# EAGLE board AQ_sensor_GSM (EAGLE 9.6.2)
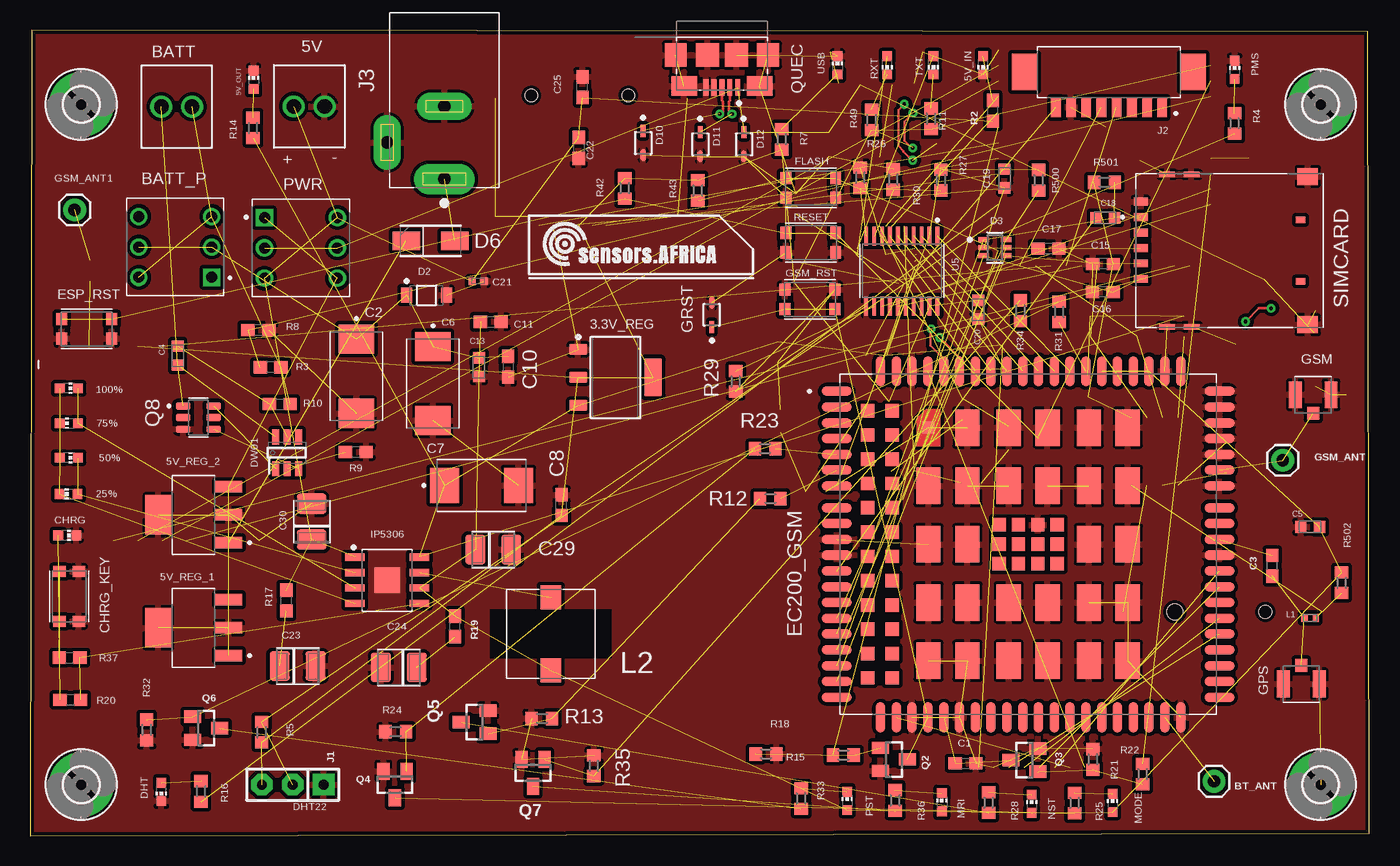
[diagram p0: board, top side]
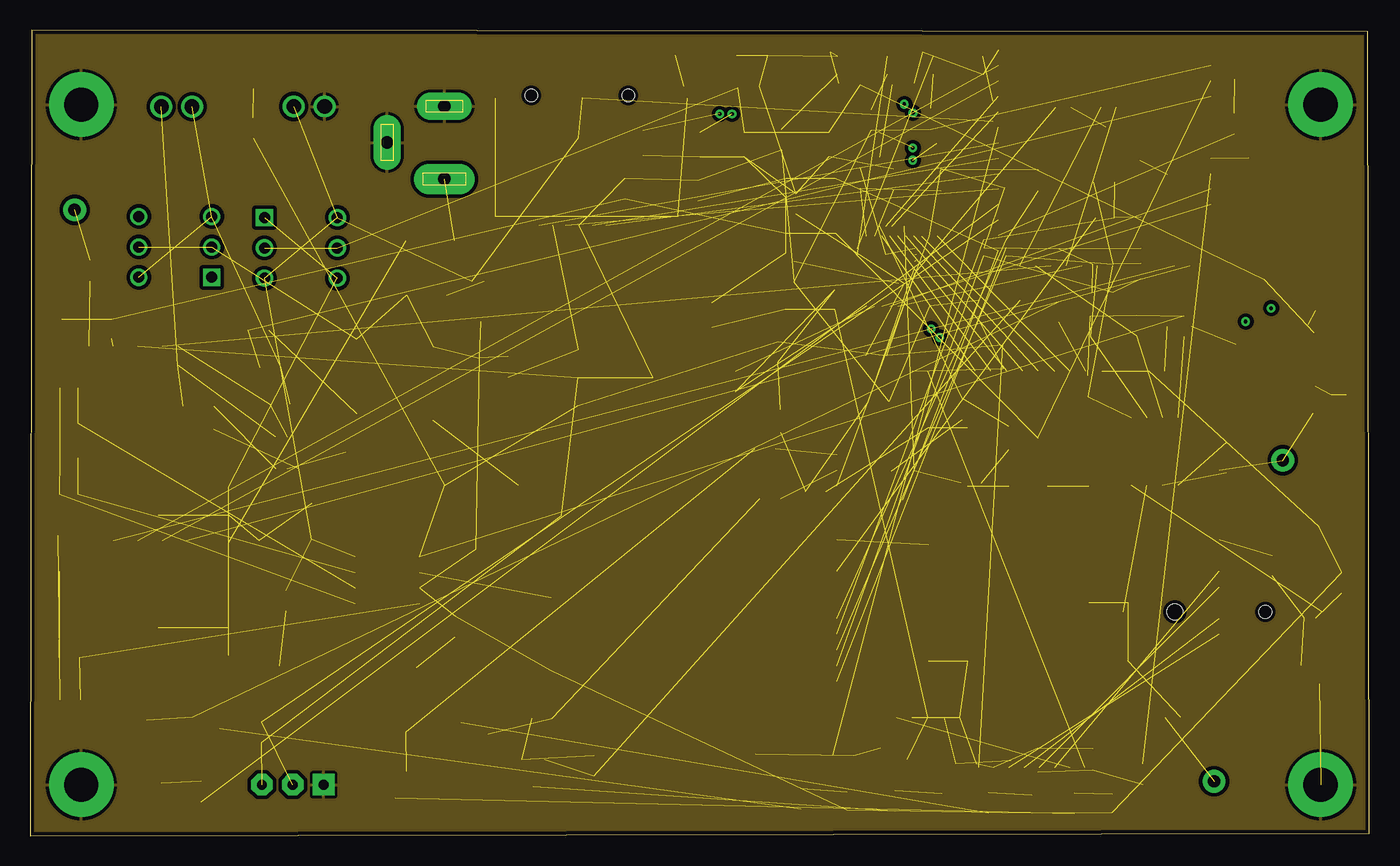
[diagram p1: board, inner layer GND]
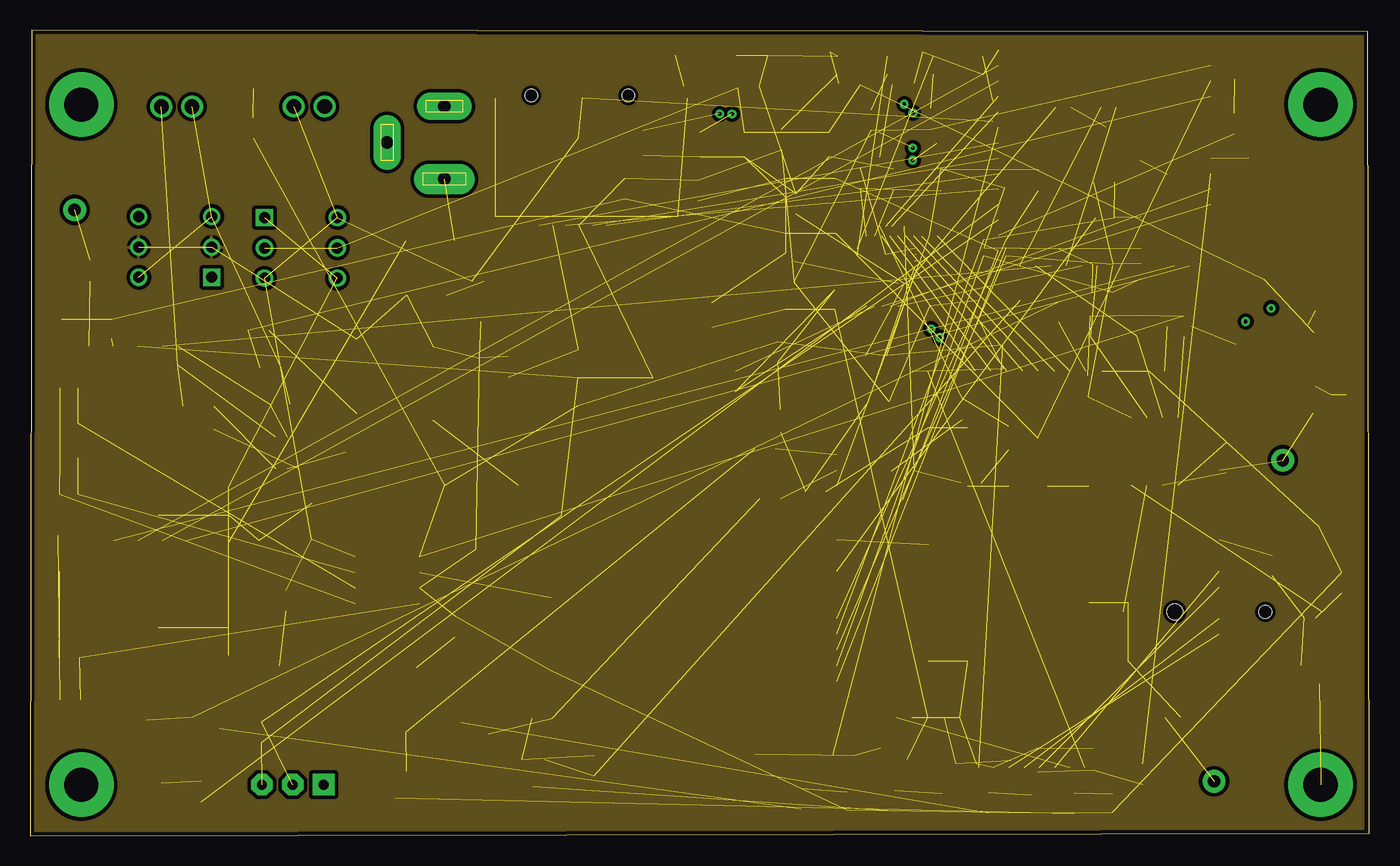
[diagram p2: board, inner layer V_LIPO]
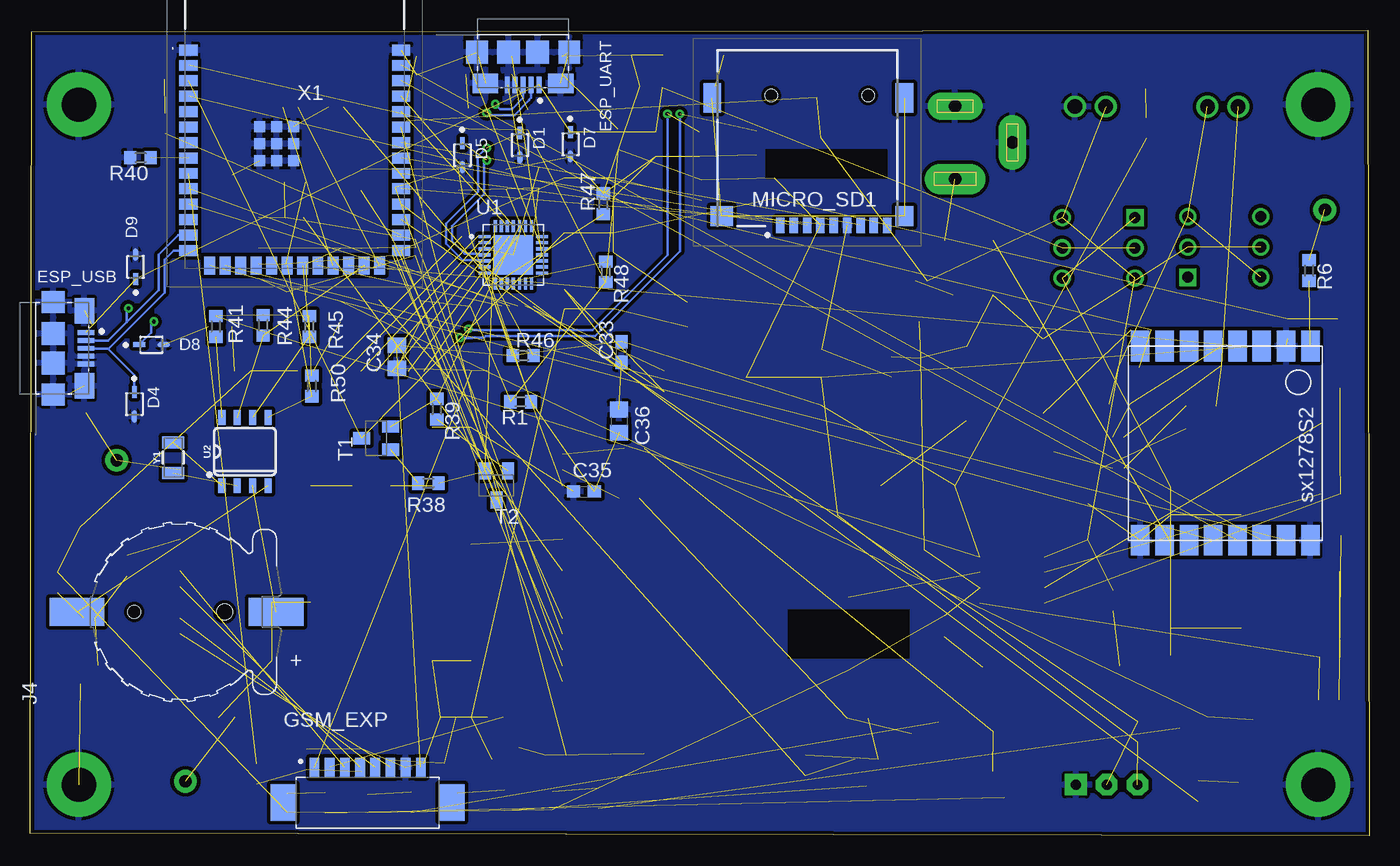
[diagram p3: board, bottom side, seen from below]

Size 110.2 x 66.3 mm. Coordinates in mm from the lower left corner, seen from the top.
Outline: 110.1,66.2 0.1,66.3 0,0 110.2,0.2 110.1,66.2
Copper layers (1+2*15+16): Top 0.035mm / dielectric 1.5mm / GND 0.035mm / dielectric 0.15mm / V_LIPO 0.035mm / dielectric 0.2mm / Bottom 0.035mm
Design rules "default *": minimum track width 0.1mm, minimum drill 0.15mm, track to track 0.3mm, track to pad 0.1mm, pad to pad 0.2mm, via to via 0.3mm, smd to smd 0.3mm, copper to edge 0.3mm, drill to drill 0.3mm, minimum pad ring 10mil, minimum via ring 8mil, stop-mask expansion 4mil, vias tented up to drill 0mil, thermal gap 10mil
Net classes: 0 default: width 0.2 mm, drill 0.2 mm, clearance 0.2 mm; 1 POWER: width 0.3 mm, drill 0.2 mm, clearance 0.2 mm to class 0, clearance 0.2 mm; 2 BGA: width 0.1 mm, drill 0.2 mm; 3 HCurrent: width 0.8 mm, drill 0.4 mm, clearance 0.2 mm to class 0; 4 Antenna: width 0.3 mm, drill 0.2 mm, clearance 0.2 mm to class 0

## Footprints (pad centres in the part's own frame; a part is rotated, then mirrored left to right if it is on the bottom)
TEXAS_INSTRUMENTS_LM1117IMP-3.3-NOPB_0 = smd 1.45 x 0.9: 1 -3.075,2.3; 2 -3.075,0; 3 -3.075,-2.3 | smd 1.45 x 3.15: 4 3.075,0
TERMBLK_254-2N = drill 1.2: 1 0,0; 2 2.54,0
CHIP-LED0603 = smd 0.8 x 0.8: A 0,-0.75; C 0,0.75
VREG_LM7805MPX/NOPB = smd 2.15 x 0.95: 1 -2.9,2.3; 2 -2.9,0; 3 -2.9,-2.3 | smd 2.15 x 3.25: 4 2.9,0
SW_TL2285EE = drill 0.9 square: 1 -2.5,-3 | drill 0.9: 2 0,-3; 3 2.5,-3; 4 -2.5,3; 5 0,3; 6 2.5,3
1X01 = drill 1.016 pad 1.88: 1 0,0
0603 = smd 1.1 x 1: 1 -0.85,0; 2 0.85,0
CAP_20TQC100MYF = smd 2.4 x 2.9: 1 -3.05,0; 2 3.05,0
CAPC1608X90N = smd 0.92 x 0.98: 1 -0.775,0; 2 0.775,0
C0603 = smd 1.1 x 1: 1 -0.85,0; 2 0.85,0
0402-TIGHT = smd 0.6 x 0.6: 1 -0.5,0; 2 0.5,0
CAP_TANT_B = smd 1.66 x 2.42: 1 -1.475,0; 2 1.475,0
C0805 = smd 1.3 x 1.5: 1 -0.95,0; 2 0.95,0
SW_KMR621NGLFS = smd 0.9 x 1: 1_1 -2.05,0.8; 1_2 2.05,0.8; 2_1 -2.05,-0.8; 2_2 2.05,-0.8
ON_SEMI_1N4148WS_0 = smd 1.006 x 0.392: 1 -1,0; 2 1,0
ON_SEMICONDUCTOR_MMSZ5231BT1G_0 = smd 0.91 x 1.22: 1 -1.635,0; 2 1.635,0
SEMTECH_SMF05C_0 = smd 0.85 x 0.4: 1 -0.925,0.65; 2 -0.925,0; 3 -0.925,-0.65; 4 0.925,-0.65; 5 0.925,0; 6 0.925,0.65
DIOM5025X220N = smd 2.25 x 1.55: 1 -2,0; 2 2,0
SOT23-6L = smd 0.55 x 1.2: 1 -0.95,-1.3; 2 0,-1.3; 3 0.95,-1.3; 4 0.95,1.3; 5 0,1.3; 6 -0.95,1.3
XCVR_EC200UCNAB-N05-SNNSA = smd 2.5 x 0.8: 1 -15.75,12.6; 2 -15.75,11.3; 3 -15.75,10; 4 -15.75,8.7; 5 -15.75,7.4; 6 -15.75,6.1; 7 -15.75,4.8; 8 -15.75,0.4; 9 -15.75,-0.9; 10 -15.75,-2.2; 11 -15.75,-3.5; 12 -15.75,-4.8; 13 -15.75,-6.1; 14 -15.75,-7.4; 15 -15.75,-8.7; 16 -15.75,-10; 17 -15.75,-11.3; 18 -15.75,-12.6; 37 15.75,-12.6; 38 15.75,-11.3; 39 15.75,-10; 40 15.75,-8.7; 41 15.75,-7.4; 42 15.75,-6.1; 43 15.75,-4.8; 44 15.75,-3.5; 45 15.75,-2.2; 46 15.75,-0.9; 47 15.75,0.4; 48 15.75,4.8; 49 15.75,6.1; 50 15.75,7.4; 51 15.75,8.7; 52 15.75,10; 53 15.75,11.3; 54 15.75,12.6; 141 -15.75,3; 142 -15.75,1.7; 143 15.75,1.7; 144 15.75,3 | smd 0.8 x 2.5: 19 -9.55,-14.25; 20 -8.25,-14.25; 21 -6.95,-14.25; 22 -5.65,-14.25; 23 -4.35,-14.25; 24 -3.05,-14.25; 25 -1.75,-14.25; 26 -0.45,-14.25; 27 0.85,-14.25; 28 2.15,-14.25; 29 3.45,-14.25; 30 4.75,-14.25; 31 6.05,-14.25; 32 7.35,-14.25; 33 8.65,-14.25; 34 9.95,-14.25; 35 11.25,-14.25; 36 12.55,-14.25; 55 12.55,14.25; 56 11.25,14.25; 57 9.95,14.25; 58 8.65,14.25; 59 7.35,14.25; 60 6.05,14.25; 61 4.75,14.25; 62 3.45,14.25; 63 2.15,14.25; 64 0.85,14.25; 65 -0.45,14.25; 66 -1.75,14.25; 67 -3.05,14.25; 68 -4.35,14.25; 69 -5.65,14.25; 70 -6.95,14.25; 71 -8.25,14.25; 72 -9.55,14.25; 113 -10.85,14.25; 114 -12.15,14.25; 115 -10.85,-14.25; 116 -12.15,-14.25 | smd 1.1 x 1.1: 73 2.4,1.6; 74 2.4,0; 75 2.4,-1.6; 76 0.8,1.6; 77 0.8,0; 78 0.8,-1.6; 79 -0.8,1.6; 80 -0.8,0; 81 -0.8,-1.6; 82 -2.4,1.6; 83 -2.4,0; 84 -2.4,-1.6; 117 -11.2,11; 118 -11.2,9; 119 -11.2,7; 120 -11.2,5; 121 -11.2,3; 122 -11.2,1; 123 -11.2,-1; 124 -11.2,-3; 125 -11.2,-5; 126 -11.2,-7; 127 -11.2,-9; 128 -11.2,-11; 129 -13.2,11; 130 -13.2,9; 131 -13.2,7; 132 -13.2,5; 133 -13.2,3; 134 -13.2,1; 135 -13.2,-1; 136 -13.2,-3; 137 -13.2,-5; 138 -13.2,-7; 139 -13.2,-9; 140 -13.2,-11 | smd 2 x 3: 85 8.2,9.6; 86 8.2,4.8; 87 8.2,0; 88 8.2,-4.8; 89 8.2,-9.6; 90 5,9.6; 91 5,4.8; 92 5,0; 93 5,-4.8; 94 5,-9.6; 95 1.6,9.6; 96 1.6,4.8; 97 1.6,-4.8; 98 1.6,-9.6; 99 -1.6,9.6; 100 -1.6,4.8; 101 -1.6,-4.8; 102 -1.6,-9.6; 103 -5,9.6; 104 -5,4.8; 105 -5,0; 106 -5,-4.8; 107 -5,-9.6; 109 -8.2,4.8; 110 -8.2,0; 111 -8.2,-4.8; 112 -8.2,-9.6 | smd 1 x 1: 108 -8.2,9.6
AMPHENOL_10118192-0001LF = smd 0.4 x 1.35: 1 -1.3,0; 2 -0.65,0; 3 0,0; 4 0.65,0; 5 1.3,0 | smd 2.1 x 1.6: SH1 -3.1,-0.125; SH2 3.1,-0.125 | smd 1.8 x 1.9: SH3 -3.8,-2.675; SH6 3.8,-2.675 | smd 1.9 x 1.9: SH4 -1.2,-2.675; SH5 1.2,-2.675
TE_1909763-1 = smd 1 x 1.05: 1 0,-1.525 | smd 1.05 x 2.2: 2 -1.475,0; 3 1.475,0
MOLEX_53261-0871 = smd 0.8 x 1.6: 1 -4.375,2.9; 2 -3.125,2.9; 3 -1.875,2.9; 4 -0.625,2.9; 5 0.625,2.9; 6 1.875,2.9; 7 3.125,2.9; 8 4.375,2.9 | smd 2.1 x 3: S1 -6.925,0; S2 6.925,0
2,8-PAD = drill 2.8 pad 5.334: B2,8 0,0
SOIC127P600X165-9T209N = smd 1.609 x 0.594: 1 -2.653,1.905; 2 -2.653,0.635; 3 -2.653,-0.635; 4 -2.653,-1.905; 5 2.653,-1.905; 6 2.653,-0.635; 7 2.653,0.635; 8 2.653,1.905 | smd 2.09 x 2.09: 9 0,0
SIP-100-03-32 = drill 0.813 pad 1.778 square: 1 -2.54,0 | drill 0.813 pad 1.778 octagon: 2 0,0; 3 2.54,0
CUI_PJ-002BH = drill 1 pad 2.5 long: 1 0,0 | drill 1 pad 2.25 long: 2 6,0; 3 3,4.7
HARWIN_S8411-45R = smd 2.3 x 4.5: N 0,8.425; P 0,-7.975 | hole 1.05: 0,3.725 | hole 1.3: 0,-3.725
INDC1005X60N = smd 0.51 x 0.63: 1 -0.46,0; 2 0.46,0
784778010 = smd 1.7 x 2: 1 0,3; 2 0,-3
TF-01A = smd 0.7 x 1.3: 1 2.23,7.174; 2 1.13,7.174; 3 0.03,7.174; 4 -1.07,7.174; 5 -2.17,7.174; 6 -3.27,7.174; 7 -4.37,7.174; 8 -5.47,7.174; CD1 -6.57,7.174 | smd 1.448 x 1.651: MP1 -7.989,6.4 | smd 1.448 x 2.438: MP2 -7.989,-3.3; MP3 7.836,-3.3 | smd 1.854 x 1.651: MP4 7.061,6.4 | hole 1: -5.004,-3.531; 2.972,-3.531
SOT23-BEC = smd 1 x 1.4: B -0.95,-1.1; C 0,1.1; E 0.95,-1.1
SOT95P280X145-6N = smd 1.21 x 0.59: 1 -1.255,0.95; 2 -1.255,0; 3 -1.255,-0.95; 4 1.255,-0.95; 5 1.255,0; 6 1.255,0.95
R0603 = smd 1 x 1.1: 1 -0.85,0; 2 0.85,0
MOLEX_78646-3001 = smd 1.15 x 0.65: C1 -7.295,2.755; C2 -7.295,0.215; C3 -7.295,-2.325; C5 -7.295,4.025; C6 -7.295,1.485; C7 -7.295,-1.055 | smd 1.3 x 0.45: G1 -5.125,6.27; G2 -3.125,6.27; G3 -5.125,-6.27; G4 -3.125,-6.27 | smd 1.7 x 1.4: G5 6.435,-6.105; G6 6.435,6.105 | smd 0.8 x 0.54: X1 5.855,2.54; X2 5.855,-2.54
SC59-BEC = smd 1 x 1.4: B -0.95,-1.2; C 0,1.2; E 0.95,-1.2
QFN50P500X500X80-29N = smd 0.99 x 0.27: 1 -2.36,1.5; 2 -2.36,1; 3 -2.36,0.5; 4 -2.36,0; 5 -2.36,-0.5; 6 -2.36,-1; 7 -2.36,-1.5; 15 2.36,-1.5; 16 2.36,-1; 17 2.36,-0.5; 18 2.36,0; 19 2.36,0.5; 20 2.36,1; 21 2.36,1.5 | smd 0.27 x 0.99: 8 -1.5,-2.36; 9 -1,-2.36; 10 -0.5,-2.36; 11 0,-2.36; 12 0.5,-2.36; 13 1,-2.36; 14 1.5,-2.36; 22 1.5,2.36; 23 1,2.36; 24 0.5,2.36; 25 0,2.36; 26 -0.5,2.36; 27 -1,2.36; 28 -1.5,2.36 | smd 3.25 x 3.25: 29 0,0
SO08-0.15 = smd 0.6 x 1.2: 1 -1.905,-2.8; 2 -0.635,-2.8; 3 0.635,-2.8; 4 1.905,-2.8; 5 1.905,2.8; 6 0.635,2.8; 7 -0.635,2.8; 8 -1.905,2.8
SOP65P640X120-20N = smd 1.57 x 0.41: 1 -2.87,2.925; 2 -2.87,2.275; 3 -2.87,1.625; 4 -2.87,0.975; 5 -2.87,0.325; 6 -2.87,-0.325; 7 -2.87,-0.975; 8 -2.87,-1.625; 9 -2.87,-2.275; 10 -2.87,-2.925; 11 2.87,-2.925; 12 2.87,-2.275; 13 2.87,-1.625; 14 2.87,-0.975; 15 2.87,-0.325; 16 2.87,0.325; 17 2.87,0.975; 18 2.87,1.625; 19 2.87,2.275; 20 2.87,2.925
SX1278 = smd 2.54 x 1.524: 1 -9,5; 2 -9,3; 3 -9,1; 4 -9,-1; 5 -9,-3; 6 -9,-5; 7 -9,-7; 8 -9,-9; 9 7,-9; 10 7,-7; 11 7,-5; 12 7,-3; 13 7,-1; 14 7,1; 15 7,3; 16 7,5
ESP32S3WROOM1N8R2 = smd 1.5 x 0.9: 1 -8.75,5.26; 2 -8.75,3.99; 3 -8.75,2.72; 4 -8.75,1.45; 5 -8.75,0.18; 6 -8.75,-1.09; 7 -8.75,-2.36; 8 -8.75,-3.63; 9 -8.75,-4.9; 10 -8.75,-6.17; 11 -8.75,-7.44; 12 -8.75,-8.71; 13 -8.75,-9.98; 14 -8.75,-11.25; 27 8.75,-11.25; 28 8.75,-9.98; 29 8.75,-8.71; 30 8.75,-7.44; 31 8.75,-6.17; 32 8.75,-4.9; 33 8.75,-3.63; 34 8.75,-2.36; 35 8.75,-1.09; 36 8.75,0.18; 37 8.75,1.45; 38 8.75,2.72; 39 8.75,3.99; 40 8.75,5.26 | smd 0.9 x 1.5: 15 -6.985,-12.5; 16 -5.715,-12.5; 17 -4.445,-12.5; 18 -3.175,-12.5; 19 -1.905,-12.5; 20 -0.635,-12.5; 21 0.635,-12.5; 22 1.905,-12.5; 23 3.175,-12.5; 24 4.445,-12.5; 25 5.715,-12.5; 26 6.985,-12.5 | smd 0.9 x 0.9: 41 -1.5,-2.46; 42 -1.5,-1.06; 43 -2.9,-1.06; 44 -2.9,-2.46; 45 -2.9,-3.86; 46 -1.5,-3.86; 47 -0.1,-3.86; 48 -0.1,-2.46; 49 -0.1,-1.06
CRYSTAL-SMD-3.2X1.5MM = smd 1 x 1.8: P$1 -1.25,0; P$2 1.25,0

## Placement (x,y rotation side)
3.3V_REG  TEXAS_INSTRUMENTS_LM1117IMP-3.3-NOPBTEXAS_INSTRUMENTS_LM1117IMP-3.3-NOPB_0_0  [TEXAS_INSTRUMENTS_LM1117IMP-3.3-NOPB_0]  48.17,37.73 0 top
5V  2828XX-2282834-2  [TERMBLK_254-2N]  21.68,60.03 0 top
5V_IN  ORANGE  [CHIP-LED0603]  78.42,63.41 180 top
5V_OUT  RED  [CHIP-LED0603]  18.37,62.24 0 top
5V_REG_1  LM7805MPX/NOPB  [VREG_LM7805MPX/NOPB]  13.44,17.12 180 top
5V_REG_2  LM7805MPX/NOPB  [VREG_LM7805MPX/NOPB]  13.44,26.42 180 top
25%  ORANGE  [CHIP-LED0603]  3.14,28.13 90 top
50%  ORANGE  [CHIP-LED0603]  3.16,31.1 270 top
75%  ORANGE  [CHIP-LED0603]  3.16,33.96 90 top
100%  ORANGE  [CHIP-LED0603]  3.16,36.84 270 top
BATT  2828XX-2282834-2  [TERMBLK_254-2N]  13.31,60.02 180 top
BATT_P  TL2285EE  [SW_TL2285EE]  11.93,48.47 90 top
BT_ANT  [1X01]  97.44,4.48 180 top
C1  10nF  [0603]  76.98,5.94 0 top
C2  20TQC100MYF  [CAP_20TQC100MYF]  26.84,37.82 270 top
C3  100pF  [0603]  102.24,22.22 90 top
C4  100nf  [CAPC1608X90N]  12.14,39.52 270 top
C5  100nf  [CAPC1608X90N]  105.34,25.42 0 top
C6  20TQC100MYF  [CAP_20TQC100MYF]  33.14,37.22 270 top
C7  20TQC100MYF  [CAP_20TQC100MYF]  37.14,28.82 0 top
C8  10uF  [C0603]  43.72,27.21 90 top
C10  33pF  [C0603]  39.31,38.61 270 top
C11  10pF  [C0603]  37.9,42.31 0 top
C13  100nf  [CAPC1608X90N]  36.93,38.57 90 top
C15  33pF  [C0603]  88.3,47.07 180 top
C16  33pF  [C0603]  88.27,44.75 180 top
C17  33pF  [C0603]  83.81,48.34 0 top
C18  100nf  [CAPC1608X90N]  88.47,50.86 0 top
C19  100nf  [CAPC1608X90N]  80.19,54.11 90 top
C20  100nf  [CAPC1608X90N]  78.03,43.3 90 top
C21  22pF  [0402-TIGHT]  36.86,45.65 0 top
C22  0.1uF  [C0603]  45.14,56.62 270 top
C23  TAJB106K016RNJ  [CAP_TANT_B]  22,13.96 0 top
C24  TAJB106K016RNJ  [CAP_TANT_B]  30.33,13.85 180 top
C25  1.0uF  [C0603]  45.44,61.62 90 top
C29  TAJB106K016RNJ  [CAP_TANT_B]  38.11,23.55 0 top
C30  TAJB106K016RNJ  [CAP_TANT_B]  23.16,25.86 90 top
C33  10uF  [C0603]  61.54,39.82 90 bottom
C34  100nF  [C0805]  80.04,39.42 90 bottom
C35  10uF  [C0603]  64.64,28.32 0 bottom
C36  100nF  [C0805]  61.74,34.12 270 bottom
CHRG  ORANGE  [CHIP-LED0603]  3.04,24.72 270 top
CHRG_KEY  KMR621NGLFS  [SW_KMR621NGLFS]  3.2,19.71 90 top
D1  ON_SEMI_1N4148WSON_SEMI_1N4148WS_0_0  [ON_SEMI_1N4148WS_0]  69.91,56.86 270 bottom
D2  ON_SEMICONDUCTOR_MMSZ5231BT1GON_SEMICONDUCTOR_MMSZ5231BT1G_0_0  [ON_SEMICONDUCTOR_MMSZ5231BT1G_0]  32.62,44.5 0 top
D3  SEMTECH_SMF05CSEMTECH_SMF05C_0_0  [SEMTECH_SMF05C_0]  79.4,48.41 0 top
D4  ON_SEMI_1N4148WSON_SEMI_1N4148WS_0_0  [ON_SEMI_1N4148WS_0]  101.64,35.52 270 bottom
D5  ON_SEMI_1N4148WSON_SEMI_1N4148WS_0_0  [ON_SEMI_1N4148WS_0]  74.64,56.02 270 bottom
D6  SS54-HF  [DIOM5025X220N]  32.94,48.97 0 top
D7  ON_SEMI_1N4148WSON_SEMI_1N4148WS_0_0  [ON_SEMI_1N4148WS_0]  65.74,56.92 270 bottom
D8  ON_SEMI_1N4148WSON_SEMI_1N4148WS_0_0  [ON_SEMI_1N4148WS_0]  100.24,40.42 0 bottom
D9  ON_SEMI_1N4148WSON_SEMI_1N4148WS_0_0  [ON_SEMI_1N4148WS_0]  101.54,46.82 90 bottom
D10  ON_SEMI_1N4148WSON_SEMI_1N4148WS_0_0  [ON_SEMI_1N4148WS_0]  50.44,57.02 270 top
D11  ON_SEMI_1N4148WSON_SEMI_1N4148WS_0_0  [ON_SEMI_1N4148WS_0]  55.14,56.92 270 top
D12  ON_SEMI_1N4148WSON_SEMI_1N4148WS_0_0  [ON_SEMI_1N4148WS_0]  58.74,56.92 270 top
DHT  GREEN  [CHIP-LED0603]  10.79,3.6 180 top
DW01  DW01-P  [SOT23-6L]  21.14,31.52 0 top
EC200_GSM  EC200UCNAB-N05-SNNSA  [XCVR_EC200UCNAB-N05-SNNSA]  82.13,23.99 0 top
ESP_RST  KMR621NGLFS  [SW_KMR621NGLFS]  4.64,41.72 180 top
ESP_UART  10118192-0001LF  [AMPHENOL_10118192-0001LF]  69.64,61.82 180 bottom
ESP_USB  10118192-0001LF  [AMPHENOL_10118192-0001LF]  105.64,40.12 270 bottom
FLASH  KMR621NGLFS  [SW_KMR621NGLFS]  64.24,53.32 0 top
GPS  1909763-1  [TE_1909763-1]  104.62,12.49 180 top
GRST  ON_SEMI_1N4148WSON_SEMI_1N4148WS_0_0  [ON_SEMI_1N4148WS_0]  56.09,42.88 90 top
GSM  1909763-1  [TE_1909763-1]  105.59,36.31 0 top
GSM_ANT  [1X01]  103.09,30.9 180 top
GSM_ANT1  [1X01]  3.64,51.52 0 top
GSM_EXP  53261-0871  [MOLEX_53261-0871]  82.44,2.72 0 bottom
GSM_RST  KMR621NGLFS  [SW_KMR621NGLFS]  64.17,44.15 0 top
H1  MOUNT-PAD-ROUND2.8  [2,8-PAD]  4.2,60.2 180 top
H2  MOUNT-PAD-ROUND2.8  [2,8-PAD]  4.2,4.2 180 top
H3  MOUNT-PAD-ROUND2.8  [2,8-PAD]  106.2,4.2 180 top
H4  MOUNT-PAD-ROUND2.8  [2,8-PAD]  106.2,60.2 180 top
IP5306  IP5306  [SOIC127P600X165-9T209N]  29.37,21.02 0 top
J1  F-1X03-SIP-100-32  [SIP-100-03-32]  21.6,4.2 180 top
J2  53261-0871  [MOLEX_53261-0871]  88.79,62.86 180 top
J3  PJ-002BH  [CUI_PJ-002BH]  34.08,54.07 90 top
J4  S8411-45R  [HARWIN_S8411-45R]  97.94,18.42 90 bottom
L1  LQW15AN47NG00D  [INDC1005X60N]  105.34,17.92 0 top
L2  784778010  [784778010]  42.85,16.61 0 top
MICRO_SD1  TF-01A  [TF-01A]  46.24,57.42 180 bottom
MODE  ORANGE  [CHIP-LED0603]  89.07,2.69 0 top
MRI  ORANGE  [CHIP-LED0603]  75.03,2.75 0 top
NST  ORANGE  [CHIP-LED0603]  82.42,2.63 0 top
PMS  ORANGE  [CHIP-LED0603]  99.13,63.05 0 top
PST  ORANGE  [CHIP-LED0603]  67.23,2.86 0 top
PWR  TL2285EE  [SW_TL2285EE]  22.27,48.39 270 top
Q2  MMBT2222  [SOT23-BEC]  71.09,6.28 270 top
Q3  MMBT2222  [SOT23-BEC]  81.83,6.22 90 top
Q4  MMBT2222  [SOT23-BEC]  30.01,4.21 180 top
Q5  MMBT2222  [SOT23-BEC]  36.56,9.35 90 top
Q6  MMBT2222  [SOT23-BEC]  14.48,8.85 270 top
Q7  MMBT2222  [SOT23-BEC]  41.38,5.17 180 top
Q8  FS8205  [SOT95P280X145-6N]  13.84,34.42 0 top
QUEC  10118192-0001LF  [AMPHENOL_10118192-0001LF]  56.92,61.6 180 top
R1  0R  [R0603]  69.84,35.72 180 bottom
R2  1k  [0603]  79.24,59.67 90 top
R3  47k  [0603]  19.78,38.56 180 top
R4  470R  [R0603]  99.11,58.64 270 top
R5  4.7K  [R0603]  19.04,8.52 90 top
R6  0R  [R0603]  4.94,46.52 270 bottom
R7  200  [R0603]  61.84,57.32 270 top
R8  10k  [0603]  18.77,41.64 0 top
R9  1k  [0603]  26.79,31.6 0 top
R10  100R  [0603]  20.54,35.52 0 top
R11  200  [R0603]  74.14,59.02 270 top
R12  4.7K  [R0603]  60.9,27.75 180 top
R13  47K  [R0603]  42.1,9.65 0 top
R14  1K  [R0603]  18.33,58.26 270 top
R15  4.7K  [R0603]  66.92,6.63 0 top
R16  470R  [R0603]  14.05,3.65 270 top
R17  2R  [0603]  21.07,19.35 90 top
R18  47K  [R0603]  60.55,6.73 180 top
R19  2R  [0603]  34.96,17.23 90 top
R20  220R  [0603]  3.29,11.18 0 top
R21  4.7K  [R0603]  91.56,5.06 270 top
R22  47K  [R0603]  87.46,6.28 270 top
R23  4.7K  [R0603]  60.49,31.86 180 top
R24  47K  [R0603]  30.08,8.56 0 top
R25  470R  [R0603]  85.94,2.69 90 top
R26  120K  [R0603]  68.31,54.16 90 top
R27  10K  [R0603]  74.95,53.97 270 top
R28  470R  [R0603]  78.87,2.72 90 top
R29  51K  [R0603]  58.05,37.41 270 top
R30  51K  [R0603]  71.02,54.02 90 top
R31  4.7K  [R0603]  84.68,43.12 90 top
R32  47K  [R0603]  9.58,8.7 90 top
R33  470R  [R0603]  63.44,3.05 90 top
R34  4.7K  [R0603]  81.5,43.23 90 top
R35  47K  [R0603]  46.39,5.76 270 top
R36  470R  [R0603]  71.19,2.9 90 top
R37  10k  [0603]  3.22,14.66 0 top
R38  10K  [R0603]  77.44,29.02 180 bottom
R39  10K  [R0603]  76.74,35.12 270 bottom
R40  10K  [R0603]  101.14,55.82 180 bottom
R41  0R  [R0603]  94.94,41.92 90 bottom
R42  10K  [R0603]  48.93,53.29 90 top
R43  10K  [R0603]  54.94,53.12 90 top
R44  47K  [R0603]  91.04,42.02 270 bottom
R45  47K  [R0603]  87.24,41.92 270 bottom
R46  20K  [R0603]  69.64,39.52 0 bottom
R47  47K  [R0603]  63.04,52.02 90 bottom
R48  10K  [R0603]  62.84,46.42 270 bottom
R49  200  [R0603]  69.24,58.92 270 top
R50  47K  [R0603]  87.04,37.02 270 bottom
R500  4.7K  [R0603]  82.99,53.96 90 top
R501  4.7K  [R0603]  88.41,53.79 0 top
R502  10R  [R0603]  107.94,20.82 90 top
RESET  KMR621NGLFS  [SW_KMR621NGLFS]  64.24,48.82 0 top
RXT  [CHIP-LED0603]  70.54,63.42 180 top
SIMCARD  78646-3001  [MOLEX_78646-3001]  98.7,48.17 0 top
T1  S8050  [SC59-BEC]  81.74,32.72 90 bottom
T2  S8050  [SC59-BEC]  71.84,28.82 180 bottom
TXT  [CHIP-LED0603]  74.34,63.42 180 top
U1  CP2102N-A02-GQFN28  [QFN50P500X500X80-29N]  70.44,47.82 0 bottom
U2  DS1307Z  [SO08-0.15]  92.54,31.62 0 bottom
U5  TXS0108EPWR  [SOP65P640X120-20N]  71.73,46.48 270 top
U$1  SX1278  [SX1278]  9.84,31.32 270 bottom
USB  [CHIP-LED0603]  66.44,63.42 0 top
X1  ESP32-S3-WROOM-1-N16R8  [ESP32S3WROOM1N8R2]  88.44,59.42 0 bottom
Y1  32.768kHz  [CRYSTAL-SMD-3.2X1.5MM]  98.44,31.12 90 bottom

## Library data of the parts
3.3V_REG = AQ_sensor_GSM; CIIVA_IDS: 19361124; CODE__IPC: SOT223-4; CODE__JEDEC: TO-261-AA; COMPONENT_LINK_1_DESCRIPTION: Datasheet URL; COMPONENT_LINK_1_URL: http://www.ti.com/general/docs/lit/getliterature.tsp?genericPartNumber=LM1117-N&fileType=pdf; COMP_TYPE: LDO IC; FOOTPRINT_VARIANT_NAME_0: Level C; FOOTPRINT_VARIANT_NAME_1: Level B; FOOTPRINT_VARIANT_NAME_2: Level A; HIGH__RELIABILITY: Y; IMPORTED: yes; IMPORTED_FROM: vault; IMPORT_TS: 1521845365; MF: Texas Instruments; MPN: LM1117IMP-3.3/NOPB; PACKAGE: DCY0004A; PACKAGE_DESCRIPTION: Molded SOT-223, 6.50 x 3.56 x 1.6mm Body, 4 Lead, 2.3mm Pitch; PACKAGE_TOP_MARKING: XYTT*N05B; PIN_COUNT: 4; POWER_WISE: N; PREFIX: U; RELEASE_DATE: 1464077430; ROHS: Yes; VAULT_GUID: 7E820BF6-F141-44C1-8A74-392CB201F257; VAULT_REVISION: 16019014-2FBF-4157-ADF5-B132B4DC413A
5V BATT = Connector; CATEGORY: Fixed Terminal Blocks; DESCRIPTION: Fixed Terminal Blocks 2P SIDE ENTRY 2.54mm; MANUFACTURER: TE Connectivity AMP Connectors; MPN: 282834-2; OPERATING_TEMPERATURE: -40°C ~ 105°C; PART_STATUS: Active; PITCH: 0.100" (2.54mm); ROHS_COMPLIANCE: RoHS Compliant; SERIES: Buchanan; SUBCATEGORY: Terminal Blocks; TYPE: Through Hole; Screw - Rising Cage Clamp; Side wire entry, Horizontal with Board
5V_IN 5V_OUT 25% 50% 75% 100% CHRG DHT MODE MRI NST PMS PST RXT TXT USB = led
5V_REG_1 5V_REG_2 = LM7805MPX_NOPB; AVAILABILITY: In Stock; CHECK_PRICES: https://www.snapeda.com/parts/LM7805MPX/NOPB/Texas+Instruments/view-part/?ref=eda; DESCRIPTION: 1.5-A, 30-V, linear voltage regulator; MF: Texas Instruments; MP: LM7805MPX/NOPB; PACKAGE: SOT-223-4 Texas Instruments; PRICE: None; PURCHASE-URL: https://www.snapeda.com/api/url_track_click_mouser/?unipart_id=546225&manufacturer=Texas Instruments&part_name=LM7805MPX/NOPB&search_term= lm7805mpx; SNAPEDA_LINK: https://www.snapeda.com/parts/LM7805MPX/NOPB/Texas+Instruments/view-part/?ref=snap
BATT_P PWR = TL2285EE; AVAILABILITY: In Stock; CHECK_PRICES: https://www.snapeda.com/parts/TL2285EE/E-Switch/view-part/?ref=eda; DESCRIPTION: Pushbutton Switch DPDT Standard Through Hole; MF: E-Switch; MP: TL2285EE; PACKAGE: None; PRICE: None; PURCHASE-URL: https://www.snapeda.com/api/url_track_click_mouser/?unipart_id=653295&manufacturer=E-Switch&part_name=TL2285EE&search_term=tl2285ee; SNAPEDA_LINK: https://www.snapeda.com/parts/TL2285EE/E-Switch/view-part/?ref=snap
BT_ANT GSM_ANT GSM_ANT1 = SparkFun-Connectors
C1 = SparkFun-Capacitors; PROD_ID: CAP-00867
C2 C6 C7 = 20TQC100MYF; AVAILABILITY: In Stock; CHECK_PRICES: https://www.snapeda.com/parts/20TQC100MYF/Panasonic+Electronic+Components/view-part/?ref=eda; DESCRIPTION: 100 µF Molded Tantalum Polymer Capacitor 20 V 2917 (7343 Metric) 55mOhm @ 100kHz; MF: Panasonic Electronic; MP: 20TQC100MYF; PACKAGE: 7343-2 Panasonic; PRICE: None; SNAPEDA_LINK: https://www.snapeda.com/parts/20TQC100MYF/Panasonic+Electronic+Components/view-part/?ref=snap
C3 = SparkFun-Capacitors; PROD_ID: CAP-07883
C4 C5 C13 C18-C20 = 06035C104K4T2A; AVAILABILITY: In Stock; CHECK_PRICES: https://www.snapeda.com/parts/06035C104K4T2A/AVX+%252F+Kyocera/view-part/?ref=eda; DESCRIPTION: Capacitor MLCC 0603 100nF 50V | AVX 06035C104K4T2A; MF: AVX; MP: 06035C104K4T2A; PACKAGE: 1608 AVX; PRICE: None; SNAPEDA_LINK: https://www.snapeda.com/parts/06035C104K4T2A/AVX+%252F+Kyocera/view-part/?ref=snap
C8 C10 C11 C15-C17 C22 C25 C33-C36 = rcl; SPICEPREFIX: C
C21 = SparkFun-Capacitors; PROD_ID: CAP-15725
C23 C24 C29 C30 = Resistor_Capacitor; CREATED_BY: PCBLayout.com; DIGIKEY_PART_NUMBER: 478-1673-2-ND; MANUFACTURER: AVX Corporation; MPN: TAJB106K016RNJ; PACKAGE: CAP TANT B
CHRG_KEY ESP_RST GSM_RST = AQ_sensor_GSM; AVAILABILITY: Unavailable; DESCRIPTION: Tactile Switch SPST-NO Top Actuated Surface Mount; MF: C&K; MP: KMR621NG LFS; PACKAGE: None; PRICE: None
D1 D4 D5 D7-D12 = noise_monitor; CENTROID_NOT_SPECIFIED: No; DATASHEET: https://www.fairchildsemi.com/datasheets/1N/1N4148WS.pdf; DIGIKEY_DESCRIPTION: DIODE GEN PURP 75V 150MA SOD323F; DIGIKEY_PART_NUMBER: 1N4148WSFSCT-ND; IPC_LAND_PATTERN_NAME: SOD250125X70-2; LEAD_FREE: yes; MF: ON Semi; MFG_PACKAGE_IDENT: CASE 477AB; MOUSER_DESCRIPTION: Diodes - General Purpose, Power, Switching Small Signal Diode; MOUSER_PART_NUMBER: 512-1N4148WS; MPN: 1N4148WS; PACKAGE: SOD-323FL; PREFIX: D; ROHS: yes; TEMPERATURE_RANGE_HIGH: +150°C
D2 = AQ_sensor_GSM; CIIVA_IDS: 804101; COMPONENT_LINK_1_DESCRIPTION: Manufacturer URL; COMPONENT_LINK_1_URL: http://www.onsemi.com/; COMPONENT_LINK_3_DESCRIPTION: Package Specification; COMPONENT_LINK_3_URL: http://www.onsemi.com/pub_link/Collateral/425-04.PDF; DATASHEET: http://www.onsemi.com/pub_link/Collateral/MMSZ5221BT1-D.PDF; DATASHEET_VERSION: Rev. 12; FOOTPRINT_VARIANT_NAME_0: Manufacturer Recommended; IMPORTED: yes; IMPORTED_FROM: vault; IMPORT_TS: 1521844429; MF: On Semiconductor; MOUNTING_TECHNOLOGY: Surface Mount; MPN: MMSZ5231BT1G; PACKAGE: SOD-123-2-425-04; PACKAGE_DESCRIPTION: 2-Pin SOD, Body 1.6 x 2.69 mm; PACKAGE_VERSION: Rev. G, 10/2009; PACKING: Tape and Reel; PREFIX: D; P_MAX_W: 0.5; RELEASE_DATE: 1407150685; ROHS: No; VAULT_GUID: 27F6BF34-1EB2-4973-A1B4-1410F52D084D; VAULT_REVISION: BBBB861B-93F7-43FE-93E6-D586C34E6C45; VZ_TYP_V: 5.1
D3 = AQ_sensor_GSM; CENTROID_NOT_SPECIFIED: No; DATASHEET: http://www.semtech.com/images/datasheet/smf05c.pdf; DIGIKEY_DESCRIPTION: DIODE TVS DIODE 5VWM 12.5VC SC70-6; DIGIKEY_PART_NUMBER: SMF05CCT-ND; JUNCTION_CAPACITANCE: 130pF max; LEAD_FREE: yes; MANUFACTURER_PRODUCT_PAGE: http://www.semtech.com/apps/product.php?pn=SMF05C; MF: Semtech; MFG_PACKAGE_IDENT: SC70-6L; MOUSER_PART_NUMBER: 947-SMF05C.TCT; MPN: SMF05C; PACKAGE: SC-70-6; PREFIX: D; REVERSE_STAND-OFF_VOLTAGE: 5V; ROHS: yes; TEMPERATURE_RANGE_HIGH: +125°C; TEMPERATURE_RANGE_LOW: -55°C
D6 = SS54-HF schottkey Diode; AVAILABILITY: In Stock; CHECK_PRICES: https://www.snapeda.com/parts/SS54-HF/Comchip+Technology/view-part/?ref=eda; DESCRIPTION: Diode Schottky 40 V 5A Surface Mount DO-214AC (SMA); MF: Comchip Technology; MP: SS54-HF; PACKAGE: DO-214AC-214 Comchip Technology; PRICE: None; PURCHASE-URL: https://www.snapeda.com/api/url_track_click_mouser/?unipart_id=5812679&manufacturer=Comchip Technology&part_name=SS54-HF&search_term=ss54; SNAPEDA_LINK: https://www.snapeda.com/parts/SS54-HF/Comchip+Technology/view-part/?ref=snap
DW01 = DW01-P; AVAILABILITY: In Stock; CHECK_PRICES: https://www.snapeda.com/parts/DW01-P/Fortune+Semiconductor/view-part/?ref=eda; DESCRIPTION: One Cell Lithium-ion/Polymer Battery Protection IC; MF: Fortune; MP: DW01-P; PACKAGE: None; PRICE: None; SNAPEDA_LINK: https://www.snapeda.com/parts/DW01-P/Fortune+Semiconductor/view-part/?ref=snap
EC200_GSM = EC200UCNAB-N05-SNNSA; AVAILABILITY: In Stock; CHECK_PRICES: https://www.snapeda.com/parts/EC200UCNAB-N05-SNNSA/Quectel/view-part/?ref=eda; DESCRIPTION: Quectel Wireless Solutions External Passive, 1559-1606, GNSS L1, Spiral, -, SMA Male (center pin), Terminal, 50 oe10; MF: Quectel; MP: EC200UCNAB-N05-SNNSA; PACKAGE: None; PRICE: None; SNAPEDA_LINK: https://www.snapeda.com/parts/EC200UCNAB-N05-SNNSA/Quectel/view-part/?ref=snap
ESP_UART ESP_USB QUEC = AQ_sensor_GSM; AVAILABILITY: Unavailable; DESCRIPTION: USB - micro B USB 2.0 Receptacle Connector 5 Position Surface Mount, Right Angle; MF: Amphenol ICC; MP: 10118192-0001LF; PACKAGE: None; PRICE: None
FLASH RESET = noise_monitor; AVAILABILITY: Unavailable; DESCRIPTION: Tactile Switch SPST-NO Top Actuated Surface Mount; MF: C&K; MP: KMR621NG LFS; PACKAGE: None; PRICE: None
GPS GSM = 1909763-1; AVAILABILITY: In Stock; CHECK_PRICES: https://www.snapeda.com/parts/1909763-1/TE+Connectivity+AMP+Connectors/view-part/?ref=eda; COMMENT: 1909763-1; DESCRIPTION: U.FL (UMCC) Connector Jack, Male Pin 50 Ohms Surface Mount Solder; MF: TE Connectivity; MP: 1909763-1; PACKAGE: None; PRICE: None; SNAPEDA_LINK: https://www.snapeda.com/parts/1909763-1/TE+Connectivity+AMP+Connectors/view-part/?ref=snap
GRST = AQ_sensor_GSM; CENTROID_NOT_SPECIFIED: No; DATASHEET: https://www.fairchildsemi.com/datasheets/1N/1N4148WS.pdf; DIGIKEY_DESCRIPTION: DIODE GEN PURP 75V 150MA SOD323F; DIGIKEY_PART_NUMBER: 1N4148WSFSCT-ND; IPC_LAND_PATTERN_NAME: SOD250125X70-2; LEAD_FREE: yes; MF: ON Semi; MFG_PACKAGE_IDENT: CASE 477AB; MOUSER_DESCRIPTION: Diodes - General Purpose, Power, Switching Small Signal Diode; MOUSER_PART_NUMBER: 512-1N4148WS; MPN: 1N4148WS; PACKAGE: SOD-323FL; PREFIX: D; ROHS: yes; TEMPERATURE_RANGE_HIGH: +150°C
GSM_EXP J2 = 53261-0871; AVAILABILITY: In Stock; CHECK_PRICES: https://www.snapeda.com/parts/53261-0871/Molex/view-part/?ref=eda; DESCRIPTION: Conn; Rect/PCB; Header; 1.25mm Pitch; W2B; 8 Pos; PicoBlade; SMT; Rt Ang; Tin | Molex Incorporated 53261-0871; MF: Molex; MP: 53261-0871; PACKAGE: None; PRICE: None; SNAPEDA_LINK: https://www.snapeda.com/parts/53261-0871/Molex/view-part/?ref=snap
H1-H4 J1 = AQ_sensor_GSM
IP5306 = IP5306
J3 = PJ-002BH; AVAILABILITY: In Stock; CHECK_PRICES: https://www.snapeda.com/parts/PJ-002BH/CUI+Devices/view-part/?ref=eda; CUI_PURCHASE_URL: https://www.cuidevices.com/product/interconnect/connectors/dc-power-connectors/jacks/pj-002bh?utm_source=snapeda.com&utm_medium=referral&utm_campaign=snapedaBOM; DESCRIPTION: 2.5 x 6.5 mm, 5.0 A, Horizontal, Through Hole, Dc Power Jack Connector; MF: CUI Devices; MP: PJ-002BH; PACKAGE: None; PRICE: None; PURCHASE-URL: https://www.snapeda.com/api/url_track_click_mouser/?unipart_id=329039&manufacturer=CUI Devices&part_name=PJ-002BH&search_term=dc power jack; SNAPEDA_LINK: https://www.snapeda.com/parts/PJ-002BH/CUI+Devices/view-part/?ref=snap
J4 = S8411-45R; AVAILABILITY: In Stock; CHECK_PRICES: https://www.snapeda.com/parts/S8411-45R/Harwin+Inc./view-part/?ref=eda; DESCRIPTION: Coin Cell Battery Retainer, Horizontal SMT, for CR1220 Coin Cell Batteries, Tape & Reeled; MF: Harwin; MP: S8411-45R; PACKAGE: None; PRICE: None; SNAPEDA_LINK: https://www.snapeda.com/parts/S8411-45R/Harwin+Inc./view-part/?ref=snap
L1 = LQW15AN47NG00D 47uh; AVAILABILITY: In Stock; CHECK_PRICES: https://www.snapeda.com/parts/LQW15AN47NG00D/Murata+Electronics+North+America/view-part/?ref=eda; DESCRIPTION: Inductor with Inductance: 47nH Tol. +/-2%, Package: 0402 (1005); MF: Murata; MP: LQW15AN47NG00D; PACKAGE: 1005 Murata; PRICE: None; PURCHASE-URL: https://www.snapeda.com/api/url_track_click_mouser/?unipart_id=1499500&manufacturer=Murata&part_name=LQW15AN47NG00D&search_term=lqw15an47ng00d; SNAPEDA_LINK: https://www.snapeda.com/parts/LQW15AN47NG00D/Murata+Electronics+North+America/view-part/?ref=snap
L2 = Fixed Inductors; CREATED_BY: PCBLayout.com; DIGIKEY_PART_NUMBER: 732-6740-2-ND; MANUFACTURER: Wurth Electronics Inc.; MPN: 784778010; PACKAGE: 7332
MICRO_SD1 = TF-01A; AVAILABILITY: Not in stock; CHECK_PRICES: https://www.snapeda.com/parts/TF-01A/HRO+Electronics+Co.%252C+Ltd./view-part/?ref=eda; DESCRIPTION: Standard Card Edge Connectors; MF: HRO Electronics Co., Ltd.; MP: TF-01A; PACKAGE: Package; PRICE: None; SNAPEDA_LINK: https://www.snapeda.com/parts/TF-01A/HRO+Electronics+Co.%252C+Ltd./view-part/?ref=snap
Q2-Q7 = MMBT2222_; AVAILABILITY: In Stock; CHECK_PRICES: https://www.snapeda.com/parts/MMBT2222/Onsemi/view-part/?ref=eda; DESCRIPTION: Bipolar (BJT) Transistor NPN 30 V 600 mA 250MHz 300 mW Surface Mount SOT-23-3 (TO-236); MF: ON Semiconductor; MP: MMBT2222; PACKAGE: SOT-23-3 Fairchild Semiconductor; PRICE: None; SNAPEDA_LINK: https://www.snapeda.com/parts/MMBT2222/Onsemi/view-part/?ref=snap
Q8 = FS8205; AVAILABILITY: In Stock; CHECK_PRICES: https://www.snapeda.com/parts/FS8205/Fortune+Semiconductor/view-part/?ref=eda; DESCRIPTION: Dual N-Channel Enhancement Mode Power MOSFET; MF: Fortune Semiconductor; MP: FS8205; PACKAGE: Package; PRICE: None; SNAPEDA_LINK: https://www.snapeda.com/parts/FS8205/Fortune+Semiconductor/view-part/?ref=snap
R1 R4-R7 R11-R16 R18 R21-R36 R38-R50 R500-R502 = rcl; SPICEPREFIX: R
R2 R3 R8-R10 R17 R19 R20 R37 = SparkFun-Resistors; PROD_ID: RES-08413
SIMCARD = 78646-3001; AVAILABILITY: In Stock; CHECK_PRICES: https://www.snapeda.com/parts/78646-3001/Molex/view-part/?ref=eda; DESCRIPTION: Horizontal Surface Mount Micro SIM Card Connector, with Push In Termination | Molex Incorporated 78646-3001; MF: Molex; MP: 78646-3001; PACKAGE: None; PRICE: None; PURCHASE-URL: https://www.snapeda.com/api/url_track_click_mouser/?unipart_id=75189&manufacturer=Molex&part_name=78646-3001&search_term= 786463001; SNAPEDA_LINK: https://www.snapeda.com/parts/78646-3001/Molex/view-part/?ref=snap
T1 T2 = noise_monitor
U1 = noise_monitor; AVAILABILITY: In Stock; DESCRIPTION: USB Bridge, USB to UART USB 2.0 UART Interface 28-QFN (5x5); MF: Silicon Labs; MP: CP2102N-A02-GQFN28; PACKAGE: WFQFN-28 Silicon Labs; PRICE: None; PURCHASE-URL: https://pricing.snapeda.com/search/part/CP2102N-A02-GQFN28/?ref=eda
U2 = SparkFun-Clocks; PROD_ID: IC-08138
U5 = TXS0108EPWR; AVAILABILITY: In Stock; CHECK_PRICES: https://www.snapeda.com/parts/TXS0108EPWR/Texas+Instruments/view-part/?ref=eda; DESCRIPTION: 8-bit bidirectional voltage-level shifter for open-drain and push-pull application; MF: Texas Instruments; MP: TXS0108EPWR; PACKAGE: TSSOP-20 Texas Instruments; PRICE: None; PURCHASE-URL: https://www.snapeda.com/api/url_track_click_mouser/?unipart_id=105750&manufacturer=Texas Instruments&part_name=TXS0108EPWR&search_term=txs0108epwr; SNAPEDA_LINK: https://www.snapeda.com/parts/TXS0108EPWR/Texas+Instruments/view-part/?ref=snap
U$1 = sx1278S2
X1 = ESP32-S3-WROOM-1-N16R8; AVAILABILITY: In Stock; CHECK_PRICES: https://www.snapeda.com/parts/ESP32-S3-WROOM-1-N16R8/Espressif+Systems/view-part/?ref=eda; DESCRIPTION: Bluetooth, WiFi 802.11b/g/n, Bluetooth v5.0 Transceiver Module 2.4GHz PCB Trace Surface Mount; MF: Espressif Systems; MP: ESP32-S3-WROOM-1-N16R8; PACKAGE: NON STANDARD Espressif Systems; PRICE: None; PURCHASE-URL: https://www.snapeda.com/api/url_track_click_mouser/?unipart_id=12089783&manufacturer=Espressif Systems&part_name=ESP32-S3-WROOM-1-N16R8&search_term=esp32-s3-wroom-1-n16r8; SNAPEDA_LINK: https://www.snapeda.com/parts/ESP32-S3-WROOM-1-N16R8/Espressif+Systems/view-part/?ref=snap
Y1 = SparkFun-Clocks; PROD_ID: XTAL-13062

## Nets
5V0UT1 [HCurrent]: 5V_REG_1.3 5V_REG_2.3 PWR.1 PWR.6
5V_IN [HCurrent]: 5V.1 C21.1 C22.1 C25.1 C30.1 IP5306.1 PWR.3 PWR.4 R2.1 R17.2
5V_OUT [HCurrent]: 3.3V_REG.3 C7.1 C33.2 C34.2 GSM_EXP.8 IP5306.8 J2.8 R14.2 R41.2 R44.1 R45.1 R46.1 R50.1 U1.7
+3V3 [HCurrent]: 3.3V_REG.2 3.3V_REG.4 C8.1 C20.2 J1.3 MICRO_SD1.4 R1.2 R5.1 R7.2 R11.2 R42.2 R43.2 R48.2 R49.2 U5.19 U$1.3 X1.2
BATT- [HCurrent]: BATT.2 C4.2 DW01.6 Q8.1
BMSV [HCurrent]: R3.2 R8.1 X1.4
BT_ANT [Antenna]: BT_ANT.1 EC200_GSM.35
DHT_LED: R16.2 X1.30
DHT_OUT: J1.2 R5.2 X1.29
DTR: R38.1 T2.E U1.28
ESP_RST: ESP_RST.2_1 ESP_RST.2_2 R42.1 RESET.1_1 RESET.1_2 T1.C X1.3
ESP_RX: U1.26 X1.36
ESP_TX: U1.25 X1.37
EUART_N: D1.1 ESP_UART.2 U1.5
EUART_P: D5.1 ESP_UART.3 U1.4
EUSB_N: D8.1 ESP_USB.2 X1.13
EUSB_P: D4.1 ESP_USB.3 X1.14
G_ADC0: EC200_GSM.45 GSM_EXP.3
G_ADC1: EC200_GSM.44 GSM_EXP.4
G_ADC2: EC200_GSM.43
G_GPIO1: EC200_GSM.126
G_I2C_SCL: EC200_GSM.41 GSM_EXP.6
G_I2C_SDA: EC200_GSM.42 GSM_EXP.5
G_SPI_CLK: EC200_GSM.40
G_SPI_CS: EC200_GSM.37
G_SPI_MISO: EC200_GSM.39
G_SPI_MOSI: EC200_GSM.38
G_USB_BOOT: EC200_GSM.115 GSM_EXP.2
G_USB_N: D11.1 EC200_GSM.70 QUEC.2
G_USB_P: D10.1 EC200_GSM.69 QUEC.3
G_USB_VBUS: EC200_GSM.71 GSM_EXP.1
GND [HCurrent]: 3.3V_REG.1 5V.2 5V_IN.C 5V_OUT.C 5V_REG_1.2 5V_REG_1.4 5V_REG_2.2 5V_REG_2.4 C1.2 C2.2 C5.1 C6.2 C7.2 C8.2 C10.2 C11.2 C13.1 C15.2 C16.2 C17.2 C19.1 C20.1 C21.2 C22.2 C23.2 C24.2 C25.2 C29.2 C30.2 C33.1 C34.1 C35.1 C36.1 CHRG.C CHRG_KEY.2_1 CHRG_KEY.2_2 D1.2 D2.2 D3.2 D4.2 D5.2 D7.2 D8.2 D9.2 D10.2 D11.2 D12.2 DHT.C EC200_GSM.8 EC200_GSM.9 EC200_GSM.19 EC200_GSM.22 EC200_GSM.36 EC200_GSM.46 EC200_GSM.48 EC200_GSM.50 EC200_GSM.51 EC200_GSM.52 EC200_GSM.53 EC200_GSM.54 EC200_GSM.56 EC200_GSM.72 EC200_GSM.76 EC200_GSM.85 EC200_GSM.86 EC200_GSM.87 EC200_GSM.88 EC200_GSM.89 EC200_GSM.90 EC200_GSM.91 EC200_GSM.92 EC200_GSM.93 EC200_GSM.94 EC200_GSM.95 EC200_GSM.96 EC200_GSM.97 EC200_GSM.98 EC200_GSM.99 EC200_GSM.100 EC200_GSM.101 EC200_GSM.102 EC200_GSM.103 EC200_GSM.104 EC200_GSM.105 EC200_GSM.106 EC200_GSM.107 EC200_GSM.108 EC200_GSM.109 EC200_GSM.110 EC200_GSM.111 EC200_GSM.112 ESP_RST.1_1 ESP_RST.1_2 ESP_UART.4 ESP_UART.5 ESP_UART.SH1 ESP_UART.SH2 ESP_UART.SH3 ESP_UART.SH4 ESP_UART.SH5 ESP_UART.SH6 ESP_USB.4 ESP_USB.5 ESP_USB.SH1 ESP_USB.SH2 ESP_USB.SH3 ESP_USB.SH4 ESP_USB.SH5 ESP_USB.SH6 FLASH.2_1 FLASH.2_2 GPS.2 GPS.3 GRST.2 GSM.2 GSM.3 GSM_EXP.7 GSM_RST.1_1 GSM_RST.1_2 H1.B2,8 H2.B2,8 H3.B2,8 H4.B2,8 IP5306.9 J1.1 J2.7 J3.2 J3.3 MICRO_SD1.6 PMS.C Q2.E Q3.E Q4.E Q5.E Q6.E Q7.E Q8.3 QUEC.4 QUEC.5 QUEC.SH1 QUEC.SH2 QUEC.SH3 QUEC.SH4 QUEC.SH5 QUEC.SH6 R8.2 R9.2 R13.1 R18.1 R22.1 R24.1 R26.2 R29.2 R30.2 R32.1 R35.1 R40.2 R47.2 RESET.2_1 RESET.2_2 SIMCARD.C5 SIMCARD.G1 SIMCARD.G2 SIMCARD.G3 SIMCARD.G4 SIMCARD.G5 SIMCARD.G6 U1.3 U1.29 U5.11 U$1.2 U$1.9 U$1.16 USB.C X1.1 X1.40 X1.41 X1.42 X1.43 X1.44 X1.45 X1.46 X1.47 X1.48 X1.49
GNSS_ANT [Antenna]: C3.2 EC200_GSM.47
GSM_ANT [Antenna]: EC200_GSM.49 GSM.1 GSM_ANT.1
GSM_RST [BGA]: EC200_GSM.20 GRST.1 GSM_RST.2_1 GSM_RST.2_2 Q2.C
GSM_RST_O: R15.1 X1.35
IO0: FLASH.1_1 FLASH.1_2 R43.1 T2.C X1.27
IO5: X1.5
IO6: X1.6
IO7: X1.7
IO8: X1.12
IO9: X1.17
IO10: X1.18
IO11: X1.19
IO15: R40.1 X1.8
L_MIS0: U$1.13 X1.38
L_MOSI: U$1.14 X1.39
L_NRESET: U$1.4 X1.24
L_NSS: U$1.15 X1.16
L_SCK: U$1.12 X1.15
LBV [HCurrent]: BATT.1 BATT_P.3 BATT_P.4 R3.1 R10.2
MAIN_CTS: EC200_GSM.64 U5.4
MAIN_DCD: EC200_GSM.63 U5.3
MAIN_DTR: EC200_GSM.66 U5.6
MAIN_RI [BGA]: EC200_GSM.62 R34.1 U5.1
MAIN_RTS: EC200_GSM.65 U5.5
MAIN_RXD: EC200_GSM.68 U5.8
MAIN_TXD: EC200_GSM.67 U5.7
MCU_CTS: U5.17
MCU_DCD: U5.18
MCU_DTR: U5.15 X1.22
MCU_RI: U5.20
MCU_RTS: U5.16
MCU_RXD: U5.14 X1.10
MCU_TXD: U5.13 X1.11
N$1: Q2.B R15.2 R18.2
N$2: Q3.B R21.2 R22.2
N$3: L1.2 R502.1
N$4: PMS.A R4.1
N$5: EC200_GSM.128
N$6: GSM_ANT1.1 R6.1
N$7: EC200_GSM.139
N$8: EC200_GSM.136
N$9: DW01.1 Q8.6
N$10: C3.1 GPS.1 L1.1
N$11: 5V_IN.A R2.2
N$13: C23.1 R17.1
N$14: 25%.C 50%.A 75%.C 100%.A IP5306.4
N$15: EC200_GSM.127
N$16: EC200_GSM.135
N$17: 25%.A 50%.C IP5306.2
N$18: 75%.A 100%.C IP5306.3
N$19: DW01.3 Q8.4
N$20: CHRG_KEY.1_1 CHRG_KEY.1_2 R37.1
N$21: IP5306.7 L2.1
N$22: Q5.B R12.2 R13.2
N$23: EC200_GSM.2
N$24: C24.1 R19.1
N$25: 5V_OUT.A R14.1
N$26: Q4.B R23.2 R24.2
N$27: DHT.A R16.1
N$28: Q6.B R31.2 R32.2
N$29: Q4.C R25.1
N$30: MODE.C R25.2
N$31: R26.1 R27.2 U5.10
N$32: Q6.C R33.1
N$33: Q5.C R28.1
N$34: NST.C R28.2
N$35: R6.2 U$1.1
N$36 [HCurrent]: 5V_REG_1.1 5V_REG_2.1 D6.1
N$37: C4.1 DW01.5 R10.1
N$38: R7.1 USB.A
N$39: PST.C R33.2
N$40: R30.1 U5.9
N$41: R29.1 U5.12
N$42: Q7.B R34.2 R35.2
N$43: Q7.C R36.1
N$44: MRI.C R36.2
N$45: IP5306.5 R20.2 R37.2
N$46: CHRG.A R20.1
N$47: DW01.2 R9.1
N$48: R38.2 T1.B
N$49: R39.2 T2.B
N$50: U2.1 Y1.P$2
N$51: U2.2 Y1.P$1
N$52: R48.1 U1.9
N$53: R46.2 R47.1 U1.8
N$54: R11.1 TXT.C
N$55: R49.1 RXT.C
N$56: TXT.A U1.19
N$57: RXT.A U1.18
N$58: J4.P U2.3
N$59: J4.N U2.4
N$61 [HCurrent]: D6.2 J3.1
N$62 [POWER]: C35.2 C36.2 R1.1 U1.6
N$63: R41.1 U2.8
NET_MODE: EC200_GSM.5 R23.1
NETSTAT [BGA]: EC200_GSM.6 R12.1
PMS_LED: R4.2 X1.28
PMS_RX: J2.5 X1.26
PMS_TX: J2.4 X1.23
PWRKEY [BGA]: C1.1 EC200_GSM.21 Q3.C
PWRKEY_0: R21.1 X1.9
PWRSTAT: EC200_GSM.61 R31.1
RTC_SCL: R45.2 U2.6 X1.21
RTC_SDA: R50.2 U2.5 X1.20
RTC_SQW: R44.2 U2.7 X1.25
RTS: R39.1 T1.E U1.24
SD_CLK: MICRO_SD1.5 X1.31
SD_CS: MICRO_SD1.2 X1.32
SD_MISO: MICRO_SD1.3 X1.33
SD_MOSI: MICRO_SD1.7 X1.34
SDIO1_VDD: EC200_GSM.34
SHIELD: MICRO_SD1.MP1 MICRO_SD1.MP2 MICRO_SD1.MP3 MICRO_SD1.MP4
SIMCLK [BGA]: C16.1 D3.3 EC200_GSM.16 SIMCARD.C3
SIMDATA: C15.1 D3.4 EC200_GSM.15 R501.1 SIMCARD.C7
SIMRST: C17.1 D3.5 EC200_GSM.17 SIMCARD.C2
USIM_DET: D3.6 EC200_GSM.13 R500.1
USIM_GND: C18.1 EC200_GSM.10
USIM_VDD: C18.2 D3.1 EC200_GSM.14 R501.2 SIMCARD.C1
V_LIPO [HCurrent]: BATT_P.2 BATT_P.5 C2.1 C5.2 C6.1 C10.1 C11.1 C13.2 C29.1 D2.1 EC200_GSM.57 EC200_GSM.58 EC200_GSM.59 EC200_GSM.60 IP5306.6 L2.2 MODE.A MRI.A NST.A PST.A R19.2 R502.2
VDD_EXT: C19.2 EC200_GSM.7 R27.1 R500.2 U5.2
VPP: SIMCARD.C6
VUSB [HCurrent]: D7.1 D9.1 D12.1 ESP_UART.1 ESP_USB.1 PWR.2 PWR.5 QUEC.1

## Tracks (layer width: path | path; a pad name or v marks a point on that pad's centre or on a via)
5V0UT1  (3 unrouted)
5V_IN  (9 unrouted)
5V_OUT  (13 unrouted)
+3V3  (16 unrouted)
BATT-  (3 unrouted)
BMSV  (2 unrouted)
BT_ANT  (1 unrouted)
DHT_LED  (1 unrouted)
DHT_OUT  (2 unrouted)
DTR  (2 unrouted)
ESP_RST  (6 unrouted)
ESP_RX  (1 unrouted)
ESP_TX  (1 unrouted)
EUART_N  (via drill 0.3)  (2 unrouted)
  Top 0.2: v72.65,59.51 71.94,58.8 71.94,57.22 72.54,56.62 v72.64,56.62
  Bottom 0.2: ESP_UART.2 68.99,60.75 69.14,60.6 69.14,60.54 70.36,59.32 72.46,59.32 v72.65,59.51 | v72.64,56.62 72.89,56.37 72.95,56.37 73.39,55.93 73.39,55.3 73.34,55.25 73.34,53.02 75.98,50.38 75.98,48.76 74.61,47.39 72.94,47.39
EUART_P  (via drill 0.3)  (2 unrouted)
  Top 0.2: v71.94,60.22 71.44,59.72 71.44,56.82 71.89,56.37 71.89,56.31 72.33,55.87 72.39,55.87 v72.64,55.62
  Bottom 0.2: ESP_UART.3 69.64,60.75 70.56,59.82 71.54,59.82 v71.94,60.22 | v72.64,55.62 72.84,55.42 72.84,52.82 75.48,50.17 75.48,48.97 74.44,47.92 73.45,47.92 73.42,47.89 72.94,47.89
EUSB_N  (via drill 0.3)
  Top 0.2: v100.04,42.32 101.14,43.42 v102.14,43.42
  Bottom 0.2: ESP_USB.2 103.79,40.77 102.29,42.27 | X1.13 98.04,49.44 99.64,47.84 99.64,44.92 102.29,42.27 | D8.1 100.24,41.42 100.24,42.12 v100.04,42.32 | v102.14,43.42 102.29,43.27 102.29,42.27
EUSB_P
  Bottom 0.2: ESP_USB.3 103.84,40.12 | 103.84,40.12 103.73,40.12 99.14,44.72 99.14,47.42 98.39,48.17 X1.14 | D4.1 101.64,37.92 103.84,40.12
G_ADC0  (1 unrouted)
G_ADC1  (1 unrouted)
G_I2C_SCL  (1 unrouted)
G_I2C_SDA  (1 unrouted)
G_USB_BOOT  (1 unrouted)
G_USB_N  (via drill 0.3)  (1 unrouted)
  Top 0.2: QUEC.2 57.57,60.52 57.5,60.45 57.5,59.42 v57.75,59.42 | EC200_GSM.70 75.18,39.26 74.1,40.34 74.1,41.68 v74.14,41.72
  Bottom 0.2: v57.75,59.42 57.75,47.81 63.94,41.62 74.04,41.62 v74.14,41.72
G_USB_P  (via drill 0.3)  (1 unrouted)
  Top 0.2: QUEC.3 56.92,60.52 57,60.45 57,59.42 v56.74,59.42 | EC200_GSM.69 76.48,39.38 v74.85,41.01
  Bottom 0.2: v56.74,59.42 56.74,48.11 63.73,41.12 72.74,41.12 72.85,41.01 73.78,41.01 73.83,40.97 74.45,40.97 74.49,41.01 v74.85,41.01
G_USB_VBUS  (1 unrouted)
GND  (67 unrouted)
  pour Top: 0.44,0.42 0.44,65.92 109.74,65.92 109.74,0.42
  pour Bottom: 0.44,0.42 0.44,65.92 109.64,65.92 109.64,0.02
  pour GND: 0.34,0.32 109.84,0.32 109.84,66.02 0.34,66.02
GNSS_ANT  (1 unrouted)
GSM_ANT  (2 unrouted)
GSM_RST  (4 unrouted)
GSM_RST_O  (1 unrouted)
IO0  (4 unrouted)
IO15  (1 unrouted)
L_MIS0  (1 unrouted)
L_MOSI  (1 unrouted)
L_NRESET  (1 unrouted)
L_NSS  (1 unrouted)
L_SCK  (1 unrouted)
LBV  (4 unrouted)
MAIN_CTS  (1 unrouted)
MAIN_DCD  (1 unrouted)
MAIN_DTR  (1 unrouted)
MAIN_RI  (2 unrouted)
MAIN_RTS  (1 unrouted)
MAIN_RXD  (1 unrouted)
MAIN_TXD  (1 unrouted)
MCU_DTR  (1 unrouted)
MCU_RXD  (1 unrouted)
MCU_TXD  (1 unrouted)
N$1  (2 unrouted)
N$2  (2 unrouted)
N$3  (1 unrouted)
N$4  (1 unrouted)
N$6  (1 unrouted)
N$9  (1 unrouted)
N$10  (2 unrouted)
N$11  (1 unrouted)
N$13  (1 unrouted)
N$14  (4 unrouted)
N$17  (2 unrouted)
N$18  (2 unrouted)
N$19  (1 unrouted)
N$20  (2 unrouted)
N$21  (1 unrouted)
N$22  (2 unrouted)
N$24  (1 unrouted)
N$25  (1 unrouted)
N$26  (2 unrouted)
N$27  (1 unrouted)
N$28  (2 unrouted)
N$29  (1 unrouted)
N$30  (1 unrouted)
N$31  (2 unrouted)
N$32  (1 unrouted)
N$33  (1 unrouted)
N$34  (1 unrouted)
N$35  (1 unrouted)
N$36  (2 unrouted)
N$37  (2 unrouted)
N$38  (1 unrouted)
N$39  (1 unrouted)
N$40  (1 unrouted)
N$41  (1 unrouted)
N$42  (2 unrouted)
N$43  (1 unrouted)
N$44  (1 unrouted)
N$45  (2 unrouted)
N$46  (1 unrouted)
N$47  (1 unrouted)
N$48  (1 unrouted)
N$49  (1 unrouted)
N$50  (1 unrouted)
N$51  (1 unrouted)
N$52  (1 unrouted)
N$53  (2 unrouted)
N$54  (1 unrouted)
N$55  (1 unrouted)
N$56  (1 unrouted)
N$57  (1 unrouted)
N$58  (1 unrouted)
N$59  (1 unrouted)
N$61  (1 unrouted)
N$62  (3 unrouted)
N$63  (1 unrouted)
NET_MODE  (1 unrouted)
NETSTAT  (1 unrouted)
PMS_LED  (1 unrouted)
PMS_RX  (1 unrouted)
PMS_TX  (1 unrouted)
PWRKEY  (2 unrouted)
PWRKEY_0  (1 unrouted)
PWRSTAT  (1 unrouted)
RTC_SCL  (2 unrouted)
RTC_SDA  (2 unrouted)
RTC_SQW  (2 unrouted)
RTS  (2 unrouted)
SD_CLK  (1 unrouted)
SD_CS  (1 unrouted)
SD_MISO  (1 unrouted)
SD_MOSI  (1 unrouted)
SHIELD  (3 unrouted)
SIMCLK  (3 unrouted)
SIMDATA  (4 unrouted)
SIMRST  (3 unrouted)
USIM_DET  (2 unrouted)
USIM_GND  (1 unrouted)
USIM_VDD  (4 unrouted)
V_LIPO  (21 unrouted)
  pour V_LIPO: 0.34,0.32 109.74,0.32 109.74,66.02 0.34,66.02
VDD_EXT  (4 unrouted)
VUSB  (7 unrouted)

## Text on the board
tPlace: + | -
tNames: DHT22